# Allegro board POWER-CYCLING2-20120604.brd
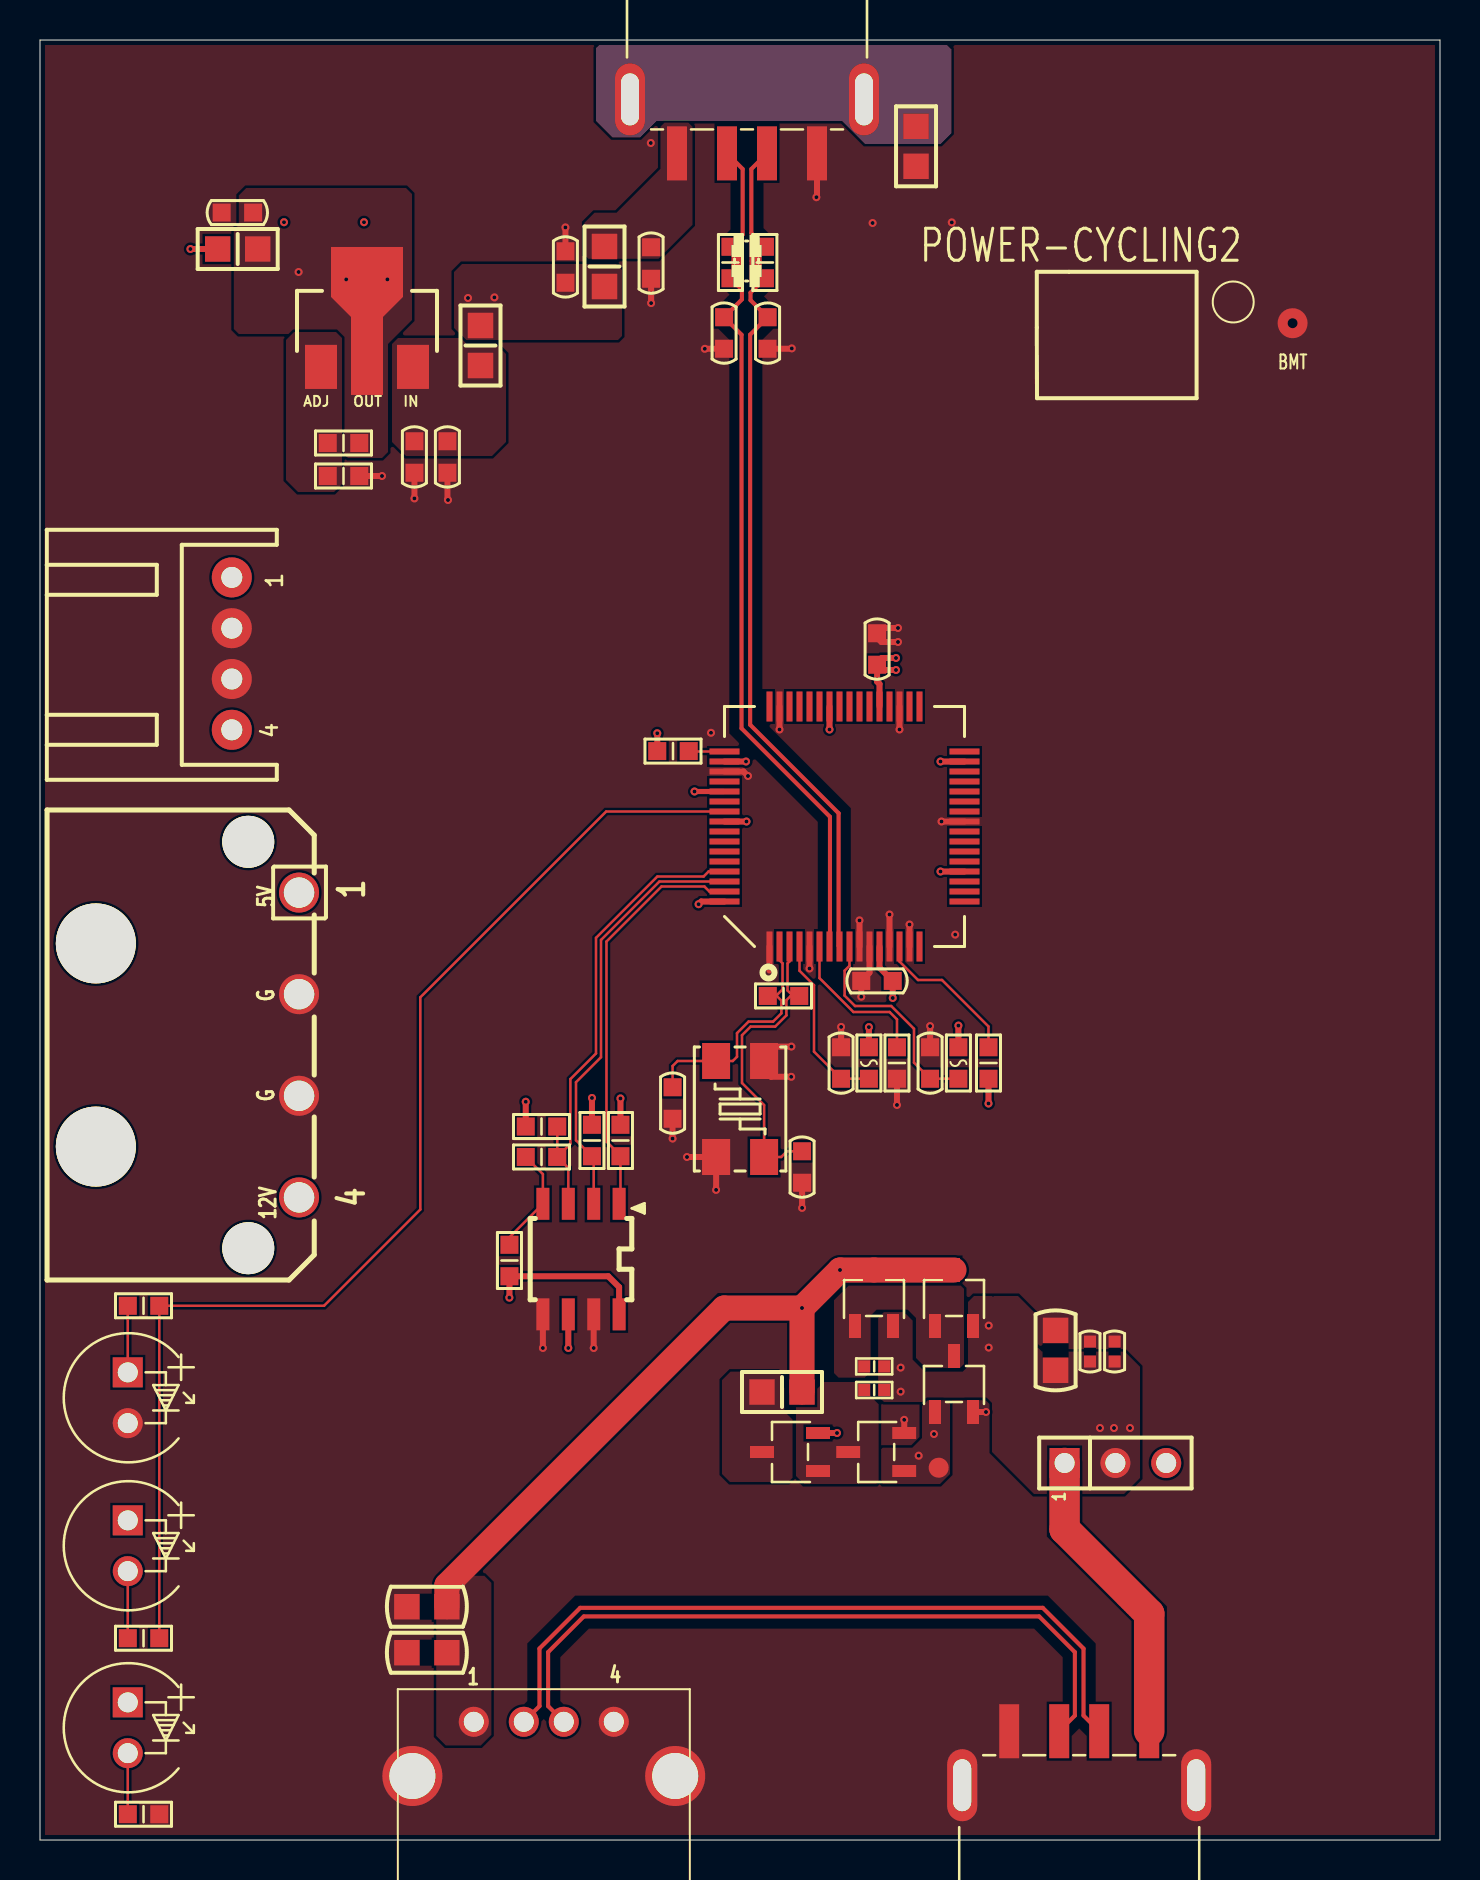
[diagram p0: board, top side]
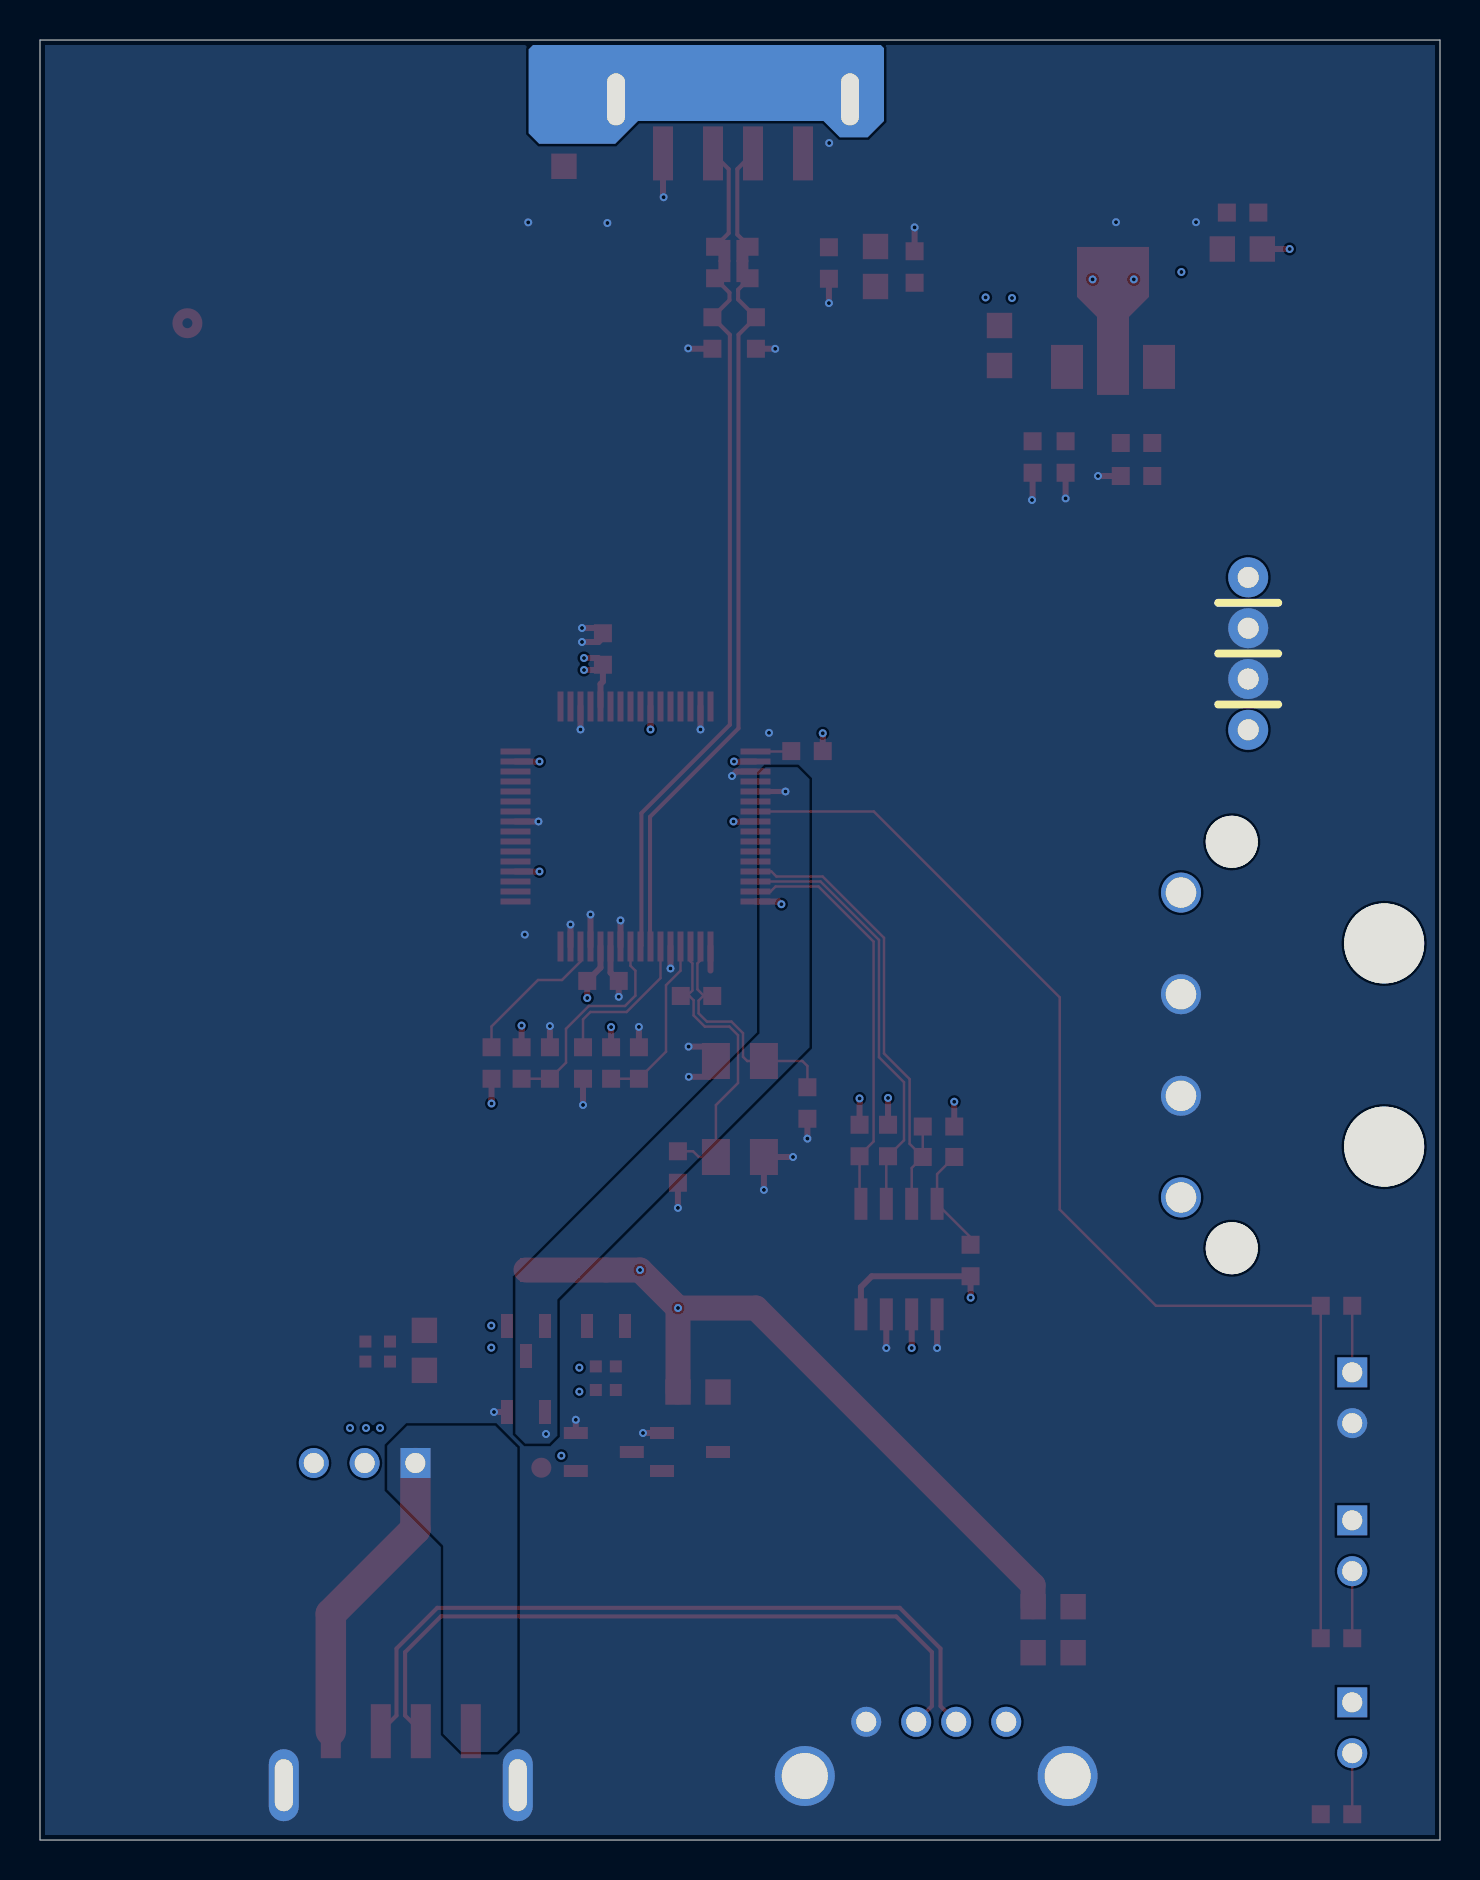
[diagram p1: board, bottom side, seen from below]

Outline 70 x 90 mm; copper layers: TOP, GND, POW, BOTTOM. Coordinates in mm from the lower left corner of the outline.
Outline path: 0,90 0,0 70,0 70,90 0,90

## Design rules (mm)
net group DIFFPAIR0: nets USB_DM USB_DP
net group DIFFPAIR1: nets HOST_DM HOST_DP
net group DIFFPAIR2: nets D+ D-
nets with their own width: min track width 0.3; nets +1.8V GND VCC33
nets with their own width: min track width 1.25; nets VIN VOUT

## Placement (name value [footprint] x y rotation side)
C1  0.1uF  [C0603]  40.05 38.85 270 top
C2  0.1uF  [C0603]  44.5 38.85 270 top
C3  4.7uF  [C0603]  41.85 59.55 270 top
C4  0.1uF  [C0603]  41.85 42.95 0 top
C5  20PF  [C0603]  31.63 36.85 270 top
C6  20PF  [C0603]  38.1 33.65 270 top
C15  3pF  [C0603]  34.2 75.35 270 top
C16  0.1uF  [C0603]  30.55 78.85 270 top
C17  2.2 uF  [C0603]  26.27 78.65 90 top
C18  3pF  [C0603]  36.38 75.35 270 top
C19  10uF  [C0603]  18.72 69.15 90 top
C20  0.1uF  [C0603]  20.37 69.15 90 top
C21  10uF  [C0603]  9.87 81.37 180 top
C22  10u  [C0805]  50.78 24.48 90 top
C23  0.1u  [C0402]  52.5 24.42 90 top
C24  1u  [C0402]  53.73 24.42 90 top
C25  10u  [C0805]  19.34 11.66 180 top
C26  10u  [C0805]  19.34 9.36 180 top
CM1  x_ACM2012-2P-900-2P-T  [SCK_2012_4]  35.33 78.95 270 top
CON1  POWER-4P-MEAL  [WPOD8-P508]  6.44 39.75 90 top
CON2  4P power socket  [W254_4A]  9.59 55.51 90 top
D1  GREEN  [DLED_P254]  4.39 14.71 270 top
D2  GREEN  [DLED_P254]  4.39 5.61 270 top
D3  RED  [DLED_P254]  4.39 22.11 270 top
JP1  -  [D_HDR3_P254]  51.23 18.85 90 top
L1  BEAD 600ohm  [L0603]  45.92 38.85 90 top
L2  BEAD 600ohm  [L0603]  41.45 38.85 90 top
L3  Bead 120  [B0805]  43.8 84.69 90 top
MN1  N-MOS  [SOT23-GDS]  37.5 19.4 90 top
MN2  N-MOS  [SOT23-GDS]  41.81 19.4 90 top
MN3  N-MOS  [SOT23-GDS]  45.7 22.8 0 top
MP1  x_P-MOS  [SOT23-GDS]  41.7 27.1 0 top
MP2  P-MOS  [SOT23-GDS]  45.7 27.1 0 top
NOREF  -  []  -24.49 -26.71 0 top
NOREF#2  -  []  62.63 75.84 0 top
R1  0  [R0603]  31.65 54.45 180 top
R2  12K  [R0603]  42.85 38.85 90 top
R3  1K  [R0603]  47.42 38.85 90 top
R4  x_10K  [R0603]  25.07 35.67 180 top
R5  x_10K  [R0603]  27.6 34.98 90 top
R6  x_10K  [R0603]  29.02 34.98 90 top
R7  x_2.2K  [R0603]  25.07 34.15 0 top
R8  x_10.0K  [R0603]  23.47 28.98 90 top
R9  1M  [R0603]  37.17 42.2 0 top
R10  0R  [R0805]  28.22 78.67 90 top
R11  1K  [R0603]  15.17 68.2 0 top
R12  620R  [R0603]  15.17 69.85 0 top
R13  0R  [R0805]  9.88 79.55 0 top
R14  330  [R0603]  5.18 10.09 0 top
R15  0R  [R0805]  22.03 74.73 270 top
R16  330R  [R0603]  5.18 1.29 0 top
R17  330  [R0603]  5.18 26.71 180 top
R21  100  [R0805]  37.1 22.4 0 top
R22  100K  [R0402]  41.71 22.5 0 top
R23  100K  [R0402]  41.71 23.68 0 top
RM1  0  [R0603]  34.52 78.87 90 top
RM2  0  [R0603]  36.25 78.87 90 top
TP1  Test Point  [TP40]  44.93 18.61 0 top
U1  FT2232HL  [LQFP64_P050_1200X1200]  40.22 50.68 0 top
U2  x_AT93C46DN-SH-B  [SOIC8_P127_550]  27.05 29.05 180 top
U3  LM1117  [SOT223_AOI]  16.35 75.95 0 top
UJ1  USB-A-Male  [D_USB4_TYPEA]  25.19 3.2 0 top
UJ2  USB-A  [S_USB4_NNPTH-117]  51.96 2.74 0 top
USB1  USB-A-Male  [S_USB4_NNPTH-117]  35.35 87.03 180 top
X1  12.000MHz  [SXTAL_600X350_4]  35 36.55 270 top

## Library data of the parts
C1-C4 C19-C22 C25 C26 = CAP
C5 C15 C17 C18 = CAP NP_3
C6 = CAP NP_5
C16 = CAP NP_4
C23 C24 = CAP_NP
CM1 = CHOKE CM_7
CON1 = POWER-CONNECTOR_3
CON2 = CON4S_2
D1-D3 = LED_0
JP1 = HEADER3
L1 L2 = INDUCTOR
L3 = INDUCTOR_0
MN1-MN3 = NMOS
MP1 MP2 = PMOS
R1 R21-R23 = R
R2 R3 R7 R8 R11 R12 = RESISTOR
R4-R6 R14 R17 = RESISTOR_0
R9 RM2 = R_2
R10 R13 R15 R16 RM1 = R_1
TP1 = Test Point
U1 = FT2232HL_2
U2 = AT93C46-10
U3 = LM1117_0
UJ1 = USB-A-Male_7
UJ2 = USB-A-Male_6
USB1 = USB-A-Male_4
X1 = 44MHz_7

## Footprints (pads in the part's own frame, mm; a bottom-side part is the same pattern mirrored in y, then rotated)
B0805
  rect 1.27x1.27 smd: 1(-1,0) 2(1,0)
C0402
  rect 0.6x0.6 smd: 1(-0.5,0) 2(0.5,0)
C0603
  rect 0.9x0.9 smd: 1(-0.787,0) 2(0.787,0)
C0805
  rect 1.27x1.27 smd: 1(-1,0) 2(1,0)
D_HDR3_P254
  rect 1.5x1.5 hole 1: 1(0,0)
  round 1.5 hole 1: 2(0,-2.54) 3(0,-5.08)
D_USB4_TYPEA
  round 1.5 hole 1: 1(-3.5,2.71) 2(-1,2.71) 3(1,2.71) 4(3.5,2.71)
  round 3 hole 2.3: E1(6.57,0) E2(-6.57,0)
DLED_P254
  rect 1.5x1.5 hole 1: A(-1.27,0)
  round 1.5 hole 1: C(1.27,0)
L0603
  rect 0.9x0.9 smd: 1(-0.787,0) 2(0.787,0)
LQFP64_P050_1200X1200
  rect 0.3x1.5 smd: 1(-3.75,-6) 2(-3.25,-6) 3(-2.75,-6) 4(-2.25,-6) 5(-1.75,-6) 6(-1.25,-6) 7(-0.75,-6) 8(-0.25,-6) 9(0.25,-6) 10(0.75,-6) 11(1.25,-6) 12(1.75,-6) 13(2.25,-6) 14(2.75,-6) 15(3.25,-6) 16(3.75,-6) 33(3.75,6) 34(3.25,6) 35(2.75,6) 36(2.25,6) 37(1.75,6) 38(1.25,6) 39(0.75,6) 40(0.25,6) 41(-0.25,6) 42(-0.75,6) 43(-1.25,6) 44(-1.75,6) 45(-2.25,6) 46(-2.75,6) 47(-3.25,6) 48(-3.75,6)
  rect 1.5x0.3 smd: 17(6,-3.75) 18(6,-3.25) 19(6,-2.75) 20(6,-2.25) 21(6,-1.75) 22(6,-1.25) 23(6,-0.75) 24(6,-0.25) 25(6,0.25) 26(6,0.75) 27(6,1.25) 28(6,1.75) 29(6,2.25) 30(6,2.75) 31(6,3.25) 32(6,3.75) 49(-6,3.75) 50(-6,3.25) 51(-6,2.75) 52(-6,2.25) 53(-6,1.75) 54(-6,1.25) 55(-6,0.75) 56(-6,0.25) 57(-6,-0.25) 58(-6,-0.75) 59(-6,-1.25) 60(-6,-1.75) 61(-6,-2.25) 62(-6,-2.75) 63(-6,-3.25) 64(-6,-3.75)
R0402
  rect 0.6x0.6 smd: 1(-0.5,0) 2(0.5,0)
R0603
  rect 0.9x0.9 smd: 1(-0.787,0) 2(0.787,0)
R0805
  rect 1.27x1.27 smd: 1(-1,0) 2(1,0)
S_USB4_NNPTH-117
  rect 1x2.7 smd: DM(1,2.7) DP(-1,2.7) G(-3.5,2.7) P(3.5,2.7)
  oval 1.5x3.6 hole 0.9x2.6: E1(-5.85,0) E2(5.85,0)
SCK_2012_4
  custom 1.108x0.6 smd: 1(-0.5,-0.45) 2(-0.5,0.45) 3(0.5,0.45) 4(0.5,-0.45)
SOIC8_P127_550
  rect 0.65x1.6 smd: 1(-1.905,-2.764) 2(-0.635,-2.764) 3(0.635,-2.764) 4(1.905,-2.764) 5(1.905,2.764) 6(0.635,2.764) 7(-0.635,2.764) 8(-1.905,2.764)
SOT23-GDS
  rect 0.6x1.2 smd: D(0,1.4) G(-0.95,-1.4) S(0.95,-1.4)
SOT223_AOI
  rect 1.6x2.2 smd: A(-2.3,-2.3) I(2.3,-2.3)
  custom 3.6x7.4 smd: O(0,0)
SXTAL_600X350_4
  rect 1.8x1.4 smd: 1(-2.4,-1.2) 2(2.4,-1.2) 3(2.4,1.2) 4(-2.4,1.2)
TP40
  round 1 smd: 1(0,0)
W254_4A
  round 2 hole 1.05: 1(0,0) 2(2.54,0) 3(5.08,0) 4(7.62,0)
WPOD8-P508
  round 2.6 hole 2.6 unplated: (-10.16,-3.972) (10.16,-3.972)
  round 4 hole 4 unplated: (-5.08,3.648) (5.08,3.648)
  round 2 hole 1.52: 1(7.62,-6.512) 2(2.54,-6.512) 3(-2.54,-6.512) 4(-7.62,-6.512)

## Nets
+1.8V: C3.2 C4.2 R1.2(R) U1.12(VCORE0) U1.37(VCORE1) U1.64(VCORE2)
+5V: CON1.1(VCC) CON2.4(+5V) JP1.3
GND: C1.1 C2.1 C3.1 C4.1 C5.2 C6.2 C15.2 C16.2 C17.2 C18.2 C19.1 C20.1 C21.2 C22.2 C23.2 C24.2 C25.2 C26.2 CON1.2(GND1) CON1.3(GND2) CON2.2(GND2) CON2.3(GND1) D3.C(CATHODE) L3.1 MN1.S(SOURCE) MN2.S(SOURCE) MN3.S(SOURCE) R2.1 R11.2 R16.2 U1.1(GND0) U1.5(GND1) U1.10(AGND) U1.11(GND2) U1.13(TEST) U1.15(GND3) U1.25(GND4) U1.35(GND5) U1.47(GND6) U1.51(GND7) U2.5(GND) U2.7(NC1) UJ1.4(GND) UJ1.E1(5) UJ1.E2(6) UJ2.E1(5) UJ2.E2(6) UJ2.G(GND) USB1.G(GND) X1.2(NC2) X1.4(NC4)
VCC33: D1.A(ANODE) D2.A(ANODE) L1.2 L2.2 R3.1 R4.2 R5.2 R6.2 R8.1 R13.1 U1.20(VCCIO0) U1.31(VCCIO1) U1.42(VCCIO2) U1.50(VREGIN) U1.56(VCCIO3) U2.6(NC2) U2.8(VCC)
VIN: C22.1 C23.1 C24.1 JP1.2 MP1.S(SOURCE) MP2.S(SOURCE) R22.2 R23.2
CGND: L3.2 USB1.E1(5) USB1.E2(6)
D+: UJ1.3(D+) UJ2.DP(D+)
D-: UJ1.2(D-) UJ2.DM(D-)
GPIOB0_H2: MN2.G(GATE) MN3.G(GATE) TP1.1(TP) U1.53(BCBUS2(H2))
GPIOB0_H4: R14.2 R17.1 U1.55(BCBUS4(H4))
HOST_DM: CM1.1 RM1.2 USB1.DM(D-)
HOST_DP: CM1.2 RM2.2 USB1.DP(D+)
POWER_ON: MN3.D(DRAIN) MP1.G(GATE) MP2.G(GATE) R23.1
USB5V: C17.1 R10.1 R15.1
USB_DM: C15.1 CM1.4 RM1.1 U1.7(DM)
USB_DP: C18.1 CM1.3 RM2.1 U1.8(DP)
VOUT: C25.1 C26.1 MP1.D(DRAIN) MP2.D(DRAIN) R21.2 UJ1.1(VCC)
VUSB: JP1.1 UJ2.P(VCC)
N20309226: C16.1 R10.2 USB1.P(VCC)
N20312659: C21.1 R12.2 R13.2 U3.O(VOUT)
N20312671: R11.1 R12.1 U3.A(ADJ-GND)
N20315234: C19.2 C20.2 R15.2 U3.I(VIN)
N20323176: D3.A(ANODE) R17.2
N20323212: D2.C(CATHODE) R16.1
N20323805: D1.C(CATHODE) R14.1
N20330241: C5.1 R9.1 U1.2(OSCI) X1.1(XIN)
N20330319: R5.1 U1.62(EECLK) U2.2(SK)
N20330337: R3.2 U1.14(R\E\S\E\T\)
N20330348: C6.1 R9.2 U1.3(OSCO) X1.3(XOUT)
N20330382: R7.1 R8.2 U2.4(DOUT)
N20330441: C2.2 L1.1 U1.9(VPLL)
N20330448: R6.1 U1.63(EECS) U2.1(CS)
N20330456: C1.2 L2.1 U1.4(VPHY)
N20330741: R4.1 R7.2 U1.61(EEDATA) U2.3(DIN)
N20330774: R1.1(C) U1.49(VREGOUT)
N20330786: R2.2 U1.6(REF)
N20420632: MN1.G(GATE) MN2.D(DRAIN) R22.1
N20422562: MN1.D(DRAIN) R21.1

Pads without a net: CON1 4; CON2 1; U1 16 17 18 19 21 22 23 24 26 27 28 29 30 32 33 34 36 38 39 40 41 43 44 45 46 48 52 54 57 58 59 60

## Via types
v1: diameter 0.4, hole 0.2, TOP to BOTTOM, 76 vias

## Routing (per net, layer and track width the routed paths; a pad name or vN(x,y) marks a point on that pad's centre or on a via; arc(x,y) is an arc through that point)
+1.8V: length 9.4
  TOP w0.3: U1.37 41.98,57.8 41.85,57.92 C3.2 ; C3.2 42.12,58.5 v1(42.8,58.5) ; C3.2 41.85,58.86 42.09,59.1 v1(42.8,59.1) ; U1.64 33.06,46.92 v1(32.93,46.79) ; U1.12 41.98,43.62 C4.2 v1(42.64,42.1) ; R1.2 v1(30.86,55.34)
GND: length 44.9
  TOP w0.3: v1(42.9,59.9) 42.07,59.9 41.85,60.12 C3.1 42.12,60.6 v1(42.9,60.6) ; U1.15 v1(43.47,45.78) ; C20.1 20.37,67.03 v1(20.4,67) ; v1(38.82,82.14) 38.85,82.17 38.85,84.3 ; U1.25 v1(45.08,50.92) ; v1(37.57,39.67) 36.58,39.67 36.2,39.29 X1.4 36.2,38.51 36.55,38.16 v1(37.56,38.16) ; MN2.S v1(43.21,21.01) ; C1.1 v1(40.05,40.65) ; U1.13 v1(42.47,46.27) ; U1.51 35.17,53.43 v1(35.4,53.2) ; C6.2 v1(38.1,31.6) ; v1(40.98,45.98) U1.10 ; U1.1 36.47,43.47 ; v1(41.06,42.16) C4.1 41.47,43.37 U1.11 ; C16.2 v1(30.55,76.85) ; MN1.S v1(39.85,20.35) ; C2.1 v1(44.5,40.7) ; C15.2 33.24,74.56 v1(33.24,74.56) ; MN3.S v1(47.3,21.4) ; R2.1 v1(42.85,36.75) ; v1(37.59,74.58) 37.57,74.56 C18.2 ; U1.35 v1(42.98,55.52) ; U1.47 v1(36.98,55.52) ; v1(33.8,32.5) X1.2 v1(32.35,34.15) ; U2.7 v1(27.68,24.6) ; C19.1 v1(18.72,67.08) ; R11.2 v1(17.1,68.2) ; U2.5 v1(25.14,24.6) ; U1.5 v1(38.47,43.57) ; C17.2 v1(26.27,80.63) ; C5.2 v1(31.63,35.07)
  vias: v1(12.2,80.89) v1(16.2,80.89) v1(30.54,84.85) v1(33.55,55.36) v1(41.63,80.85) v1(45.59,80.88) v1(45.76,45.27)
VCC33: length 24.1
  TOP w0.3: R4.2 v1(24.29,36.91) ; L1.2 v1(45.92,40.72) ; R3.1 v1(47.42,36.83) ; U2.6 v1(26.41,24.6) ; U1.50 v1(35.3,53.92) ; R5.2 v1(27.6,37.1) ; R13.1 v1(7.52,79.55) ; U1.42 v1(39.47,55.52) ; U2.8 28.95,27.65 28.41,28.19 R8.1 23.47,27.12 v1(23.47,27.12) ; L2.2 v1(41.45,40.65) ; U1.20 v1(45.03,48.43) ; U1.56 v1(35.33,50.92) ; U1.31 v1(45.03,53.92) ; R6.2 v1(29.02,37.08)
VIN:
  vias: v1(43.03,23.62) v1(43.03,22.42) v1(47.44,25.72) v1(47.44,24.62) v1(53,20.6) v1(53.7,20.6) v1(54.5,20.6)
D+: length 35.9
  TOP w0.203: UJ2.DP 51.74,6.22 51.74,9.39 49.96,11.18 27.19,11.18 25.41,9.39 25.41,6.69 UJ1.3
D-: length 37.3
  TOP w0.203: UJ1.2 24.97,6.69 24.97,9.57 27.01,11.61 50.14,11.61 52.18,9.57 52.18,6.22 UJ2.DM
GPIOB0_H2: length 1.5
  TOP w0.254: U1.53 v1(32.73,52.43)
  vias: v1(43.93,19.21) v1(44.7,20.3)
GPIOB0_H4: length 61.3
  TOP w0.125: U1.55 28.31,51.43 19.01,42.13 19.01,31.52 14.2,26.71 R17.1 R14.2
HOST_DM: length 5.7
  TOP w0.203: CM1.1 34.67,79.66 RM1.2 35.13,80.27 35.13,83.55 USB1.DM
HOST_DP: length 5.8
  TOP w0.203: CM1.2 35.99,79.66 RM2.2 35.57,80.34 35.57,83.55 USB1.DP
USB5V:
  vias: v1(21.4,77.1) v1(22.72,77.13)
USB_DM: length 36.8
  TOP w0.203: U1.7 39.5,44.7 39.5,51.16 35.08,55.58 35.08,75.27 C15.1 35.1,77.03 35.1,77.52 RM1.1 34.63,78.09 34.88,78.34 CM1.4
USB_DP: length 37
  TOP w0.203: CM1.3 35.78,78.34 36.03,78.09 RM2.1 35.53,77.37 35.53,76.99 C18.1 35.51,75.27 35.51,55.76 39.93,51.34 39.93,44.72 U1.8
VOUT: length 37.2
  TOP w1.25: R21.2 v1(38.1,26.6) ; v1(38.1,26.6) 34.21,26.6 20.34,12.74 C25.1 ; v1(38.1,26.6) v1(40,28.5) MP1.D MP2.D
VUSB: length 15.2
  TOP w1.524: JP1.1 51.23,15.54 55.46,11.31 UJ2.P
N20312659:
  vias: v1(12.93,78.4) v1(15.31,78.03) v1(17.37,78.03)
N20323176: length 3.3
  TOP w0.125: R17.2 D3.A
N20323212: length 3.1
  TOP w0.125: D2.C R16.1
N20323805: length 3.4
  TOP w0.125: D1.C R14.1
N20330241: length 12.4
  TOP w0.125: U1.2 36.98,43.99 37.13,43.83 37.13,42.53 36.8,42.2 ; C5.1 31.63,38.7 31.88,38.95 X1.1 34.64,38.95 34.85,39.16 34.85,40.34 35.43,40.92 36.66,40.92 37.07,41.33 37.07,41.97 36.84,42.2 36.8,42.2 ; 36.8,42.2 R9.1
N20330319: length 21.5
  TOP w0.125: U2.2 27.68,34.1 R5.1 26.8,34.99 26.8,37.89 28.05,39.14 28.05,45 30.97,47.92 U1.62
N20330337: length 7.6
  TOP w0.125: R3.2 47.42,40.68 45.1,43 43.9,43 42.98,43.92 U1.14
N20330348: length 15.3
  TOP w0.125: 37.65,42.2 37.53,42.2 37.32,41.99 37.32,41.23 36.76,40.67 35.53,40.67 35.1,40.24 35.1,37.85 36.2,36.75 X1.3 37.06,34.15 37.35,34.44 C6.1 ; 37.65,42.2 R9.2 ; 37.65,42.2 37.38,42.48 37.38,43.83 37.47,43.93 U1.3
N20330382: length 5.4
  TOP w0.125: R8.2 23.47,30.14 U2.4 25.14,33.29 R7.1
N20330441: length 11
  TOP w0.125: U1.9 40.47,43.71 40.23,43.47 40.23,42.22 40.75,41.7 42.56,41.7 43.7,40.56 43.7,38.87 C2.2 L1.1
N20330448: length 20.6
  TOP w0.125: U2.1 29.02,31.88 R6.1 29.02,34.22 28.32,34.93 28.32,44.92 31.08,47.68 33.22,47.68 33.47,47.43 U1.63
N20330456: length 8.9
  TOP w0.125: L2.1 C1.2 38.7,39.42 38.7,42.74 37.98,43.46 U1.4
N20330741: length 23.7
  TOP w0.125: U1.61 33.43,48.43 33.18,48.17 30.87,48.17 27.8,45.11 27.8,39.33 26.52,38.05 26.52,34.81 R7.2 ; R7.2 26.41,33.6 U2.3 ; R7.2 R4.1
N20330774: length 1.8
  TOP w0.125: U1.49 32.46,54.43 R1.1
N20330786: length 7.7
  TOP w0.125: U1.6 38.98,43.09 40.67,41.4 42.48,41.4 42.85,41.03 R2.2

## Copper pours and planes (outline as drawn; the poured copper is in the pictures)
+1.8V on POW: 43.3,59.55 30.48,59.55 29.54,58.61 29.54,42.54 30.56,41.52 43.56,41.52 44.2,42.16 44.2,46.03 42.72,47.51 36.58,47.51 34.89,49.2 34.89,55.39 36.21,56.71 43.43,56.71 44.13,57.41 44.13,58.72
+5V on POW: 20.17,22.47 24.92,17.71 54.64,17.71 55.14,18.21 55.14,20.32 55.54,20.72 56.94,20.72 58.04,19.61 58.04,17.21 57.99,17.16 57.99,13.26 57.64,12.91 22.72,12.91 14.81,20.82 14.81,43.13 8.01,49.94 8.01,63.95 8.71,64.65 11.01,64.65 12.76,62.9 12.76,56.84 20.17,49.44
GND on TOP: 0.25,0.25 0.25,89.75 69.75,89.75 69.75,0.25 ; 7 cut-outs
GND on BOTTOM, GND: 0.25,0.25 0.25,89.75 69.75,89.75 69.75,0.25
VCC33 on POW: 0.25,0.25 0.25,89.75 69.75,89.75 69.75,0.25
VIN on TOP: 55,18.1 54.2,17.3 49.7,17.3 47.6,19.4 47.6,21.85 47.34,22.12 44.33,22.12 44.12,21.9 42.2,21.9 41.91,22.19 41.91,26.11 42.2,26.4 43.2,26.4 43.63,25.97 43.63,24.02 44.23,23.42 46.14,23.42 46.4,23.68 46.4,26.9 46.7,27.2 47.6,27.2 47.65,27.15 47.7,27.2 48.9,27.2 49.76,26.34 49.76,24.76 50.1,24.42 54.24,24.42 55,23.66
VIN on POW: 41.73,26.42 53.24,26.42 55.04,24.62 55.04,18.31 54.54,17.81 52.94,17.81 52.44,18.31 52.44,20.52 50.84,22.12 41.63,22.12 41.13,22.62 41.13,25.82
CGND on BOTTOM (solid shape): 45.57,89.53 45.57,85.34 45.04,84.81 41.24,84.81 40.1,85.95 30.82,85.95 30.01,85.13 28.61,85.13 27.8,85.95 27.8,89.59 27.96,89.75 45.35,89.75
CGND on GND (solid shape): 45.57,89.53 45.57,85.34 45.04,84.81 41.24,84.81 40.1,85.95 30.82,85.95 30.01,85.13 28.61,85.13 27.8,85.95 27.8,89.59 27.96,89.75 45.35,89.75
CGND on POW (solid shape): 45.57,89.53 45.57,85.34 45.04,84.81 41.24,84.81 40.1,85.95 30.82,85.95 30.01,85.13 28.61,85.13 27.8,85.95 27.8,89.59 27.96,89.75 45.35,89.75
CGND on TOP: 40.1,85.95 30.82,85.95 30.01,85.13 28.61,85.13 27.8,85.95 27.8,89.59 27.96,89.75 45.35,89.75 45.57,89.53 45.57,85.34 45.04,84.81 41.24,84.81
GPIOB0_H2 on TOP: 45,17.8 45.5,18.3 45.5,21.8 45.3,22 44.4,22 44.1,21.7 44.1,20.1 43.61,19.61 42.13,19.61 42.03,19.51 42.03,17.91 42.15,17.8
GPIOB0_H2 on BOTTOM: 31.52,53.04 31.52,39.63 44.13,27.02 44.13,20.22 44.53,19.82 45.73,19.82 46.24,20.32 46.24,28.12 34.03,40.33 34.03,53.34 33.73,53.64 32.12,53.64
POWER_ON on TOP: 39.7,26.99 40.43,27.72 46.03,27.72 46.2,27.56 46.2,23.8 46,23.6 44.3,23.6 43.8,24.1 43.8,26.1 43.38,26.52 41.83,26.52 41.53,26.22 41.53,23.42 41.23,23.12 39.93,23.12 39.7,23.35
USB5V on TOP: 21.3,75 28.9,75 29.1,75.2 29.1,78.5 28.8,78.8 21.1,78.8 20.7,78.4 20.7,75.6
VOUT on TOP: 22.57,12.86 22.22,13.21 20.26,13.21 19.81,12.76 19.81,5.2 20.29,4.73 22.04,4.73 22.57,5.25
VUSB on BOTTOM: 51.64,20.72 47.24,20.72 46.14,19.61 46.14,5.4 47.14,4.4 48.94,4.4 49.84,5.3 49.84,14.71 52.64,17.51 52.64,19.71
N20309226 on TOP: 32.42,85.87 31.22,85.87 31.02,85.67 31.02,83.56 28.82,81.36 27.72,81.36 27.22,80.86 27.22,79.26 27.42,79.06 30.92,79.06 32.62,80.76 32.62,85.67
N20312659 on TOP: 14.8,75.3 15.2,74.9 15.2,69.3 15.4,69.1 17.1,69.1 17.4,69.4 17.4,74.8 18.6,76 18.6,82.3 18.3,82.6 10.31,82.6 9.94,82.23 9.94,80.77 9.69,80.52 9.69,75.55 9.94,75.3
N20312671 on TOP: 14.8,75.4 12.7,75.4 12.3,75 12.3,68 12.9,67.4 14.7,67.4 15.1,67.8 15.1,75.1
N20315234 on TOP: 22.9,74.7 21.44,74.7 21.04,75.1 17.9,75.1 17.6,74.8 17.6,69.9 18.3,69.2 22.6,69.2 23.3,69.9 23.3,74.3
N20420632 on TOP: 38.2,17.8 41.82,17.8 41.93,17.91 41.93,21.79 41.5,22.22 41.5,22.8 41.4,22.9 39.2,22.9 38.82,22.52 37.93,22.52 37.8,22.39 37.8,18.2
N20422562 on TOP: 37.2,23.12 37.2,22.62 37.21,22.6 37.21,21.43 37.63,21.02 37.63,18.11 37.41,17.9 34.5,17.9 34.1,18.3 34.1,22.99 34.53,23.42 36.9,23.42

## Text on the board
Ref Des/Silkscreen Top: BMT | POWER-CYCLING2
User.23: S-POWER CYCLING-20110623.DSN | L-POWER CYCLING-20110621.BRD | S-POWER CYCLING-20110623.RAR | XXXX | Howard | Jenny
User.24: FIGURE | SIZE | 0.2 | 0.5 | 1.0 | 2.6 | 2.6x0.9 | DRILL CHART: TOP to BOTTOM | ALL UNITS ARE IN MILLIMETERS | PLATED | QTY | 394 | 32 | 54 | 4 | 2
